# Altium PCB custom_line_V1.PcbDoc (part 2 of 2)
Units mm, origin at the board's own origin, x right, y up, seen from the top; angles counter-clockwise.
Board outline 111.2 x 38.5 mm, 2 copper layers (Top Layer, Bottom Layer); 243 components, 134 nets, 677 pads, 483 vias.
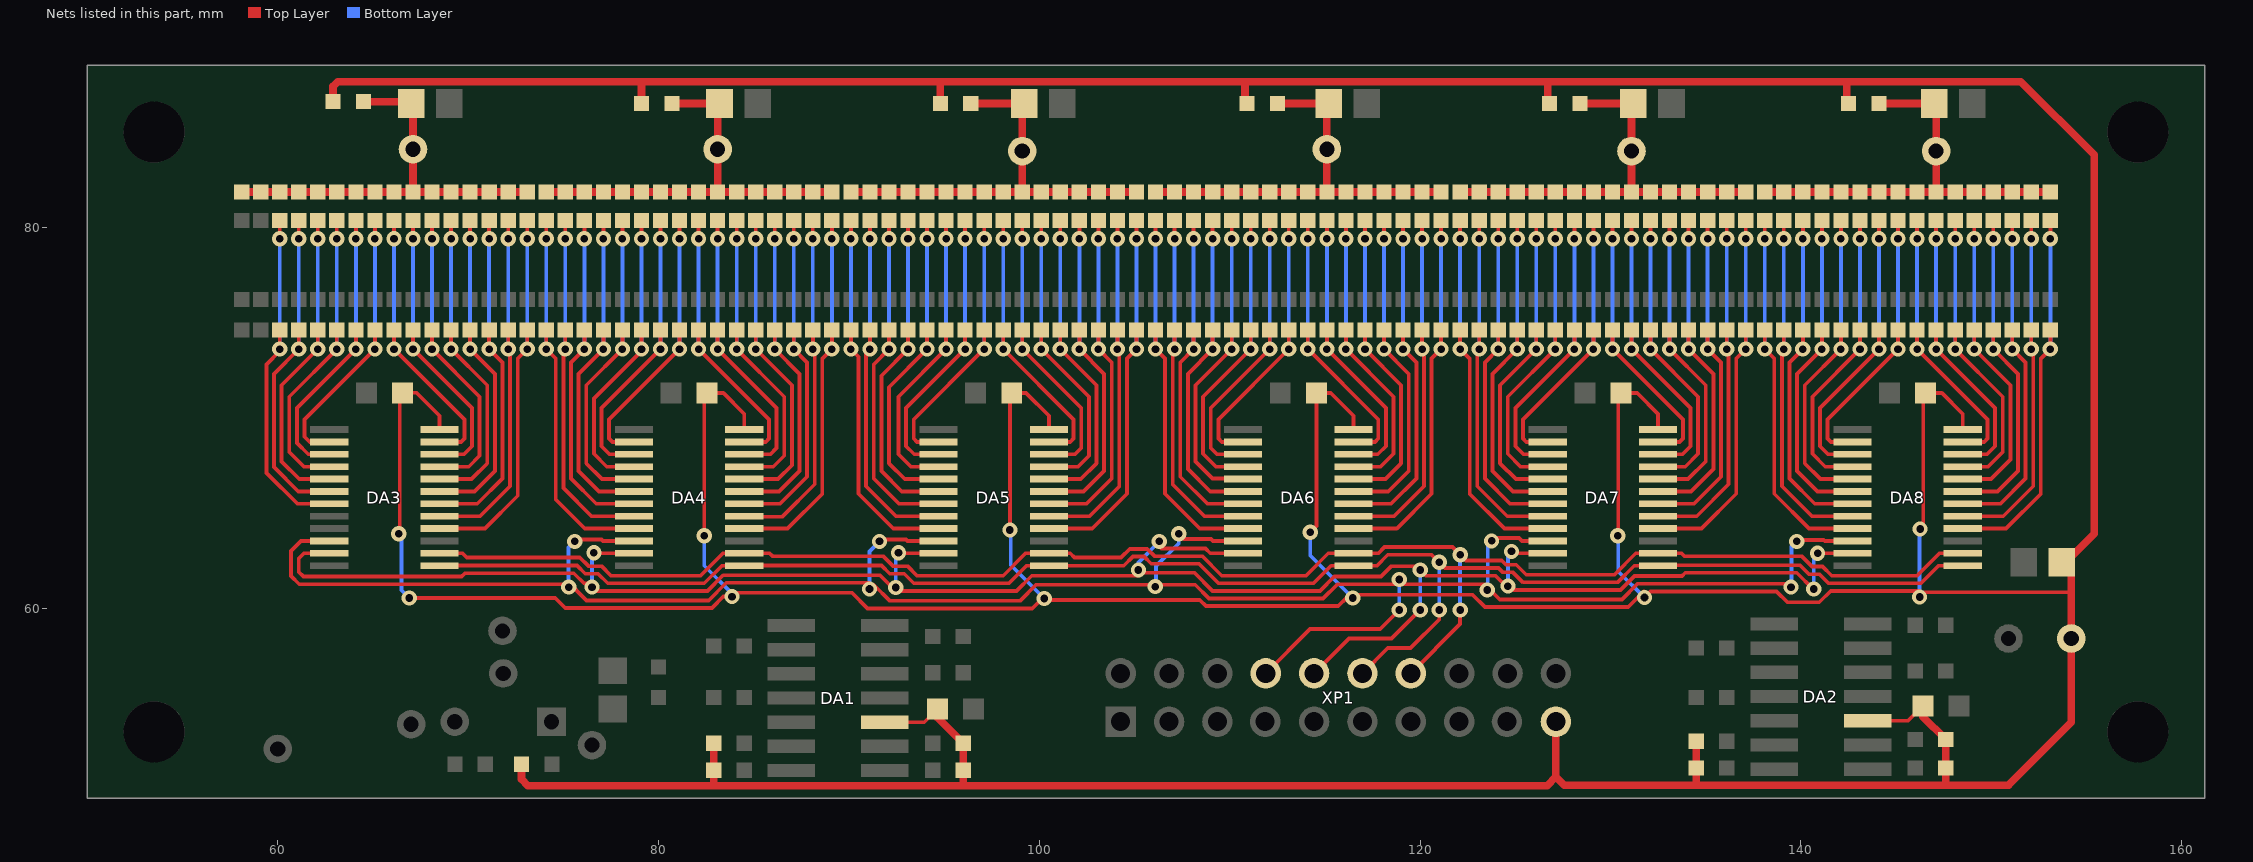
[diagram p2: the nets of this part, all layers, seen from the top]

## Via types
v1: diameter 0.8, hole 0.4, Top Layer to Bottom Layer, tented both sides, 387 vias
v2: diameter 0.8, hole 0.4, Top Layer to Bottom Layer, tented top, 96 vias

## Nets (pads, with @x,y where several pads share a name; then routed paths per layer and width w, separated by ;. In a path a pad name is that pad's centre, name@x,y a point inside that pad or via, vN(x,y) a via of type N, cw(c..) or ccw(c..) an arc to the next point about the centre after c; other vN are vias at no path point) (continued)
P3: DA3.7 R27.2 VT7.2 | length 18.4
  Top Layer w0.2: v2@60.1,73.5 59.4,72.8 59.4,67.1 61.025,65.475 DA3.7@62.7,65.475 ; v2@60.1,73.59 R27.2@60.1,74.6 ; v1(60.1,79.4) VT7.2@60.1,80.35
  Bottom Layer w0.2: v2@60.1,73.59 v1(60.1,79.4)
  other v2: 60.1,73.6
P4: DA3.6 R30.2 VT10.2 | length 17.9
  Top Layer w0.2: R30.2@61.1,74.6 v2(61.1,73.6) 59.8,72.3 59.8,67.4 61.075,66.125 DA3.6@62.7,66.125 ; v1(61.1,79.4) VT10.2@61.1,80.35
  Bottom Layer w0.2: v2(61.1,73.6) v1(61.1,79.4)
P5: DA3.5 R33.2 VT13.2 | length 17.3
  Top Layer w0.2: R33.2@62.1,74.6 v2(62.1,73.6) 60.2,71.7 60.2,67.7 61.125,66.775 DA3.5@62.7,66.775 ; v1(62.1,79.4) VT13.2@62.1,80.35
  Bottom Layer w0.2: v2(62.1,73.6) v1(62.1,79.4)
P6: DA3.4 R35.2 VT14.2 | length 16.6
  Top Layer w0.2: DA3.4@62.7,67.425 61.375,67.425 60.6,68.2 60.6,71.1 v2(63.1,73.6) R35.2@63.1,74.6 ; v1(63.1,79.4) VT14.2@63.1,80.35
  Bottom Layer w0.2: v2(63.1,73.6) v1(63.1,79.4)
P7: DA3.3 R36.2 VT15.2 | length 15.9
  Top Layer w0.2: DA3.3@62.7,68.075 61.601,68.075 61,68.676 61,70.5 v2(64.1,73.6) R36.2@64.1,74.6 ; v1(64.1,79.4) VT15.2@64.1,80.35
  Bottom Layer w0.2: v2(64.1,73.6) v1(64.1,79.4)
P8: DA3.2 R37.2 VT16.2 | length 15.3
  Top Layer w0.2: DA3.2@62.7,68.725 61.675,68.725 61.4,69 61.4,69.9 v2(65.1,73.6) R37.2@65.1,74.6 ; v1(65.1,79.4) VT16.2@65.1,80.35
  Bottom Layer w0.2: v2(65.1,73.6) v1(65.1,79.4)
P9: DA3.23 R22.2 VT1.2 | length 15.4
  Top Layer w0.2: R22.2@66.1,74.6 v2(66.1,73.6) 69.8,69.9 69.8,68.9 69.625,68.725 DA3.23@68.5,68.725 ; v1(66.1,79.4) VT1.2@66.1,80.35
  Bottom Layer w0.2: v2(66.1,73.6) v1(66.1,79.4)
P10: DA3.22 R25.2 VT5.2 | length 16
  Top Layer w0.2: R25.2@67.1,74.6 v2(67.1,73.6) 70.2,70.5 70.2,68.5 69.775,68.075 DA3.22@68.5,68.075 ; v1(67.1,79.4) VT5.2@67.1,80.35
  Bottom Layer w0.2: v2(67.1,73.6) v1(67.1,79.4)
P11: DA3.21 R28.2 VT8.2 | length 16.7
  Top Layer w0.2: R28.2@68.1,74.6 v2(68.1,73.6) 70.6,71.1 70.6,68 70.025,67.425 DA3.21@68.5,67.425 ; v1(68.1,79.4) VT8.2@68.1,80.35
  Bottom Layer w0.2: v2(68.1,73.6) v1(68.1,79.4)
P12: DA3.20 R31.2 VT11.2 | length 17.4
  Top Layer w0.2: DA3.20@68.5,66.775 70.175,66.775 71,67.6 71,71.7 v2(69.1,73.6) R31.2@69.1,74.6 ; v1(69.1,79.4) VT11.2@69.1,80.35
  Bottom Layer w0.2: v2(69.1,73.6) v1(69.1,79.4)
P13: DA3.19 R23.2 VT3.2 | length 18
  Top Layer w0.2: DA3.19@68.5,66.125 70.325,66.125 71.4,67.2 71.4,72.3 v2(70.1,73.6) R23.2@70.1,74.6 ; v1(70.1,79.4) VT3.2@70.1,80.35
  Bottom Layer w0.2: v2(70.1,73.6) v1(70.1,79.4)
P14: DA3.18 R26.2 VT6.2 | length 18.7
  Top Layer w0.2: DA3.18@68.5,65.475 70.475,65.475 71.8,66.8 71.8,72.9 v2(71.1,73.6) R26.2@71.1,74.6 ; v1(71.1,79.4) VT6.2@71.1,80.35
  Bottom Layer w0.2: v2(71.1,73.6) v1(71.1,79.4)
P15: DA3.17 R29.2 VT9.2 | length 19
  Top Layer w0.2: DA3.17@68.5,64.825 70.625,64.825 72.2,66.4 72.2,73.2 ; R29.2@72.1,74.6 v2(72.1,73.6) v2@72.2,73.5 ; v1(72.1,79.4) VT9.2@72.1,80.35
  Bottom Layer w0.2: v2(72.1,73.6) v1(72.1,79.4)
P16: DA3.16 R32.2 VT12.2 | length 20.5
  Top Layer w0.2: DA3.16@68.5,64.175 70.875,64.175 72.6,65.9 72.6,73.1 v2(73.1,73.6) R32.2@73.1,74.6 ; v1(73.1,79.4) VT12.2@73.1,80.35
  Bottom Layer w0.2: v2(73.1,73.6) v1(73.1,79.4)
P17: DA4.9 R38.2 VT18.2 | length 20.6
  Top Layer w0.2: R38.2@74.1,74.6 v2(74.1,73.6) 74.6,73.1 74.6,65.7 76.125,64.175 DA4.9@78.7,64.175 ; v1(74.1,79.4) VT18.2@74.1,80.35
  Bottom Layer w0.2: v2(74.1,73.6) v1(74.1,79.4)
P18: DA4.8 R41.2 VT20.2 | length 19.3
  Top Layer w0.2: v2@75,73.5 75,66.3 76.475,64.825 DA4.8@78.7,64.825 ; v2(75.1,73.6) R41.2@75.1,74.6 ; v1(75.1,79.4) VT20.2@75.1,80.35
  Bottom Layer w0.2: v2(75.1,73.6) v1(75.1,79.4)
P19: DA4.7 R44.2 VT23.2 | length 18.7
  Top Layer w0.2: R44.2@76.1,74.6 v2(76.1,73.6) 75.4,72.9 75.4,66.8 76.725,65.475 DA4.7@78.7,65.475 ; v1(76.1,79.4) VT23.2@76.1,80.35
  Bottom Layer w0.2: v2(76.1,73.6) v1(76.1,79.4)
P20: DA4.6 R47.2 VT26.2 | length 18
  Top Layer w0.2: R47.2@77.1,74.6 v2(77.1,73.6) 75.8,72.3 75.8,67.2 76.875,66.125 DA4.6@78.7,66.125 ; v1(77.1,79.4) VT26.2@77.1,80.35
  Bottom Layer w0.2: v2(77.1,73.6) v1(77.1,79.4)
P21: DA4.5 R50.2 VT29.2 | length 17.4
  Top Layer w0.2: R50.2@78.1,74.6 v2(78.1,73.6) 76.2,71.7 76.2,67.6 77.025,66.775 DA4.5@78.7,66.775 ; v1(78.1,79.4) VT29.2@78.1,80.35
  Bottom Layer w0.2: v2(78.1,73.6) v1(78.1,79.4)
P22: DA4.4 R52.2 VT30.2 | length 16.6
  Top Layer w0.2: DA4.4@78.7,67.425 77.275,67.425 76.6,68.1 76.6,71 v2@79.1,73.5 ; v2@79.1,73.59 R52.2@79.1,74.6 ; v1(79.1,79.4) VT30.2@79.1,80.35
  Bottom Layer w0.2: v2@79.1,73.59 v1(79.1,79.4)
  other v2: 79.1,73.6
P23: DA4.3 R53.2 VT31.2 | length 16
  Top Layer w0.2: DA4.3@78.7,68.075 77.425,68.075 77,68.5 77,70.5 v2(80.1,73.6) R53.2@80.1,74.6 ; v1(80.1,79.4) VT31.2@80.1,80.35
  Bottom Layer w0.2: v2(80.1,73.6) v1(80.1,79.4)
P24: DA4.2 R54.2 VT32.2 | length 15.4
  Top Layer w0.2: DA4.2@78.7,68.725 77.575,68.725 77.4,68.9 77.4,69.9 v2(81.1,73.6) R54.2@81.1,74.6 ; v1(81.1,79.4) VT32.2@81.1,80.35
  Bottom Layer w0.2: v2(81.1,73.6) v1(81.1,79.4)
P25: DA4.23 R39.2 VT17.2 | length 15.4
  Top Layer w0.2: R39.2@82.1,74.6 v2(82.1,73.6) 85.8,69.9 85.8,68.9 85.625,68.725 DA4.23@84.5,68.725 ; v1(82.1,79.4) VT17.2@82.1,80.35
  Bottom Layer w0.2: v2(82.1,73.6) v1(82.1,79.4)
P26: DA4.22 R42.2 VT21.2 | length 16.1
  Top Layer w0.2: R42.2@83.1,74.6 v2(83.1,73.6) 86.2,70.5 86.2,68.4 85.875,68.075 DA4.22@84.5,68.075 ; v1(83.1,79.4) VT21.2@83.1,80.35
  Bottom Layer w0.2: v2(83.1,73.6) v1(83.1,79.4)
P27: DA4.21 R45.2 VT24.2 | length 16.7
  Top Layer w0.2: R45.2@84.1,74.6 v2(84.1,73.6) 86.6,71.1 86.6,68 86.025,67.425 DA4.21@84.5,67.425 ; v1(84.1,79.4) VT24.2@84.1,80.35
  Bottom Layer w0.2: v2(84.1,73.6) v1(84.1,79.4)
P28: DA4.20 R48.2 VT27.2 | length 17.4
  Top Layer w0.2: DA4.20@84.5,66.775 86.275,66.775 87,67.5 87,71.7 v2(85.1,73.6) R48.2@85.1,74.6 ; v1(85.1,79.4) VT27.2@85.1,80.35
  Bottom Layer w0.2: v2(85.1,73.6) v1(85.1,79.4)
P29: DA4.19 R40.2 VT19.2 | length 18
  Top Layer w0.2: DA4.19@84.5,66.125 86.325,66.125 87.4,67.2 87.4,72.3 v2(86.1,73.6) R40.2@86.1,74.6 ; v1(86.1,79.4) VT19.2@86.1,80.35
  Bottom Layer w0.2: v2(86.1,73.6) v1(86.1,79.4)
P30: DA4.18 R43.2 VT22.2 | length 18.6
  Top Layer w0.2: DA4.18@84.5,65.475 86.375,65.475 87.8,66.9 87.8,72.9 v2(87.1,73.6) R43.2@87.1,74.6 ; v1(87.1,79.4) VT22.2@87.1,80.35
  Bottom Layer w0.2: v2(87.1,73.6) v1(87.1,79.4)
P31: DA4.17 R46.2 VT25.2 | length 19.3
  Top Layer w0.2: DA4.17@84.5,64.825 84.525,64.8 86.5,64.8 88.2,66.5 88.2,73.5 v2(88.1,73.6) 88.1,74.1 88.105,74.095 ; v1(88.1,79.4) VT25.2@88.1,80.35 ; v2@88.105,73.6 88.105,74.095 ; R46.2@88.105,74.595 88.105,74.095
  Bottom Layer w0.2: 88.1,74.1 v1(88.1,79.4)
P32: DA4.16 R49.2 VT28.2 | length 20.4
  Top Layer w0.2: DA4.16@84.5,64.175 86.775,64.175 88.6,66 88.6,73.1 v2(89.1,73.6) R49.2@89.1,74.6 ; v1(89.1,79.4) VT28.2@89.1,80.35
  Bottom Layer w0.2: v2(89.1,73.6) v1(89.1,79.4)
P33: DA5.9 R55.2 VT34.2 | length 20.5
  Top Layer w0.2: R55.2@90.1,74.6 v2(90.1,73.6) 90.5,73.2 90.5,66 92.325,64.175 DA5.9@94.7,64.175 ; v1(90.1,79.4) VT34.2@90.1,80.35
  Bottom Layer w0.2: v2(90.1,73.6) v1(90.1,79.4)
P34: DA5.8 R58.2 VT36.2 | length 19.5
  Top Layer w0.2: R58.2@91.1,74.6 v2(91.1,73.6) 90.9,73.4 90.9,66.4 92.475,64.825 DA5.8@94.7,64.825 ; v1(91.1,79.4) VT36.2@91.1,80.35
  Bottom Layer w0.2: v2(91.1,73.6) v1(91.1,79.4)
P35: DA5.7 R61.2 VT39.2 | length 18.8
  Top Layer w0.2: R61.2@92.1,74.6 v2(92.1,73.6) 91.3,72.8 91.3,66.8 92.625,65.475 DA5.7@94.7,65.475 ; v1(92.1,79.4) VT39.2@92.1,80.35
  Bottom Layer w0.2: v2(92.1,73.6) v1(92.1,79.4)
P36: DA5.6 R64.2 VT42.2 | length 18.2
  Top Layer w0.2: R64.2@93.1,74.6 v2(93.1,73.6) 91.7,72.2 91.7,67.2 92.775,66.125 DA5.6@94.7,66.125 ; v1(93.1,79.4) VT42.2@93.1,80.35
  Bottom Layer w0.2: v2(93.1,73.6) v1(93.1,79.4)
P37: DA5.5 R67.2 VT45.2 | length 17.5
  Top Layer w0.2: R67.2@94.1,74.6 v2(94.1,73.6) 92.1,71.6 92.1,67.6 92.925,66.775 DA5.5@94.7,66.775 ; v1(94.1,79.4) VT45.2@94.1,80.35
  Bottom Layer w0.2: v2(94.1,73.6) v1(94.1,79.4)
P38: DA5.4 R69.2 VT46.2 | length 16.7
  Top Layer w0.2: DA5.4@94.7,67.425 93.251,67.425 92.6,68.076 92.6,71.1 v2(95.1,73.6) R69.2@95.1,74.6 ; v1(95.1,79.4) VT46.2@95.1,80.35
  Bottom Layer w0.2: v2(95.1,73.6) v1(95.1,79.4)
P39: DA5.3 R70.2 VT47.2 | length 16
  Top Layer w0.2: DA5.3@94.7,68.075 93.425,68.075 93,68.5 93,70.5 v2(96.1,73.6) R70.2@96.1,74.6 ; v1(96.1,79.4) VT47.2@96.1,80.35
  Bottom Layer w0.2: v2(96.1,73.6) v1(96.1,79.4)
P40: DA5.2 R71.2 VT48.2 | length 15.4
  Top Layer w0.2: DA5.2@94.7,68.725 93.575,68.725 93.4,68.9 93.4,69.9 v2(97.1,73.6) R71.2@97.1,74.6 ; v1(97.1,79.4) VT48.2@97.1,80.35
  Bottom Layer w0.2: v2(97.1,73.6) v1(97.1,79.4)
P41: DA5.23 R56.2 VT33.2 | length 15.4
  Top Layer w0.2: R56.2@98.1,74.6 v2(98.1,73.6) 101.8,69.9 101.8,68.9 101.625,68.725 DA5.23@100.5,68.725 ; v1(98.1,79.4) VT33.2@98.1,80.35
  Bottom Layer w0.2: v2(98.1,73.6) v1(98.1,79.4)
P42: DA5.22 R59.2 VT37.2 | length 16.1
  Top Layer w0.2: R59.2@99.1,74.6 v2(99.1,73.6) 102.2,70.5 102.2,68.4 101.875,68.075 DA5.22@100.5,68.075 ; v1(99.1,79.4) VT37.2@99.1,80.35
  Bottom Layer w0.2: v2(99.1,73.6) v1(99.1,79.4)
P43: DA5.21 R62.2 VT40.2 | length 16.7
  Top Layer w0.2: R62.2@100.1,74.6 v2(100.1,73.6) 102.6,71.1 102.6,68 102.025,67.425 DA5.21@100.5,67.425 ; v1(100.1,79.4) VT40.2@100.1,80.35
  Bottom Layer w0.2: v2(100.1,73.6) v1(100.1,79.4)
P44: DA5.20 R65.2 VT43.2 | length 17.4
  Top Layer w0.2: DA5.20@100.5,66.775 102.175,66.775 103,67.6 103,71.7 v2(101.1,73.6) R65.2@101.1,74.6 ; v1(101.1,79.4) VT43.2@101.1,80.35
  Bottom Layer w0.2: v2(101.1,73.6) v1(101.1,79.4)
P45: DA5.19 R57.2 VT35.2 | length 18
  Top Layer w0.2: DA5.19@100.5,66.125 102.325,66.125 103.4,67.2 103.4,72.3 v2(102.1,73.6) R57.2@102.1,74.6 ; v1(102.1,79.4) VT35.2@102.1,80.35
  Bottom Layer w0.2: v2(102.1,73.6) v1(102.1,79.4)
P46: DA5.18 R60.2 VT38.2 | length 18.7
  Top Layer w0.2: DA5.18@100.5,65.475 102.475,65.475 103.8,66.8 103.8,72.9 v2(103.1,73.6) R60.2@103.1,74.6 ; v1(103.1,79.4) VT38.2@103.1,80.35
  Bottom Layer w0.2: v2(103.1,73.6) v1(103.1,79.4)
P47: DA5.17 R63.2 VT41.2 | length 19.2
  Top Layer w0.2: DA5.17@100.5,64.825 102.625,64.825 104.2,66.4 v2@104.2,73.5 ; v2(104.1,73.6) R63.2@104.1,74.6 ; v1(104.1,79.4) VT41.2@104.1,80.35
  Bottom Layer w0.2: v2(104.1,73.6) v1(104.1,79.4)
P48: DA5.16 R66.2 VT44.2 | length 20.4
  Top Layer w0.2: DA5.16@100.5,64.175 102.775,64.175 104.6,66 104.6,73.1 v2(105.1,73.6) R66.2@105.1,74.6 ; v1(105.1,79.4) VT44.2@105.1,80.35
  Bottom Layer w0.2: v2(105.1,73.6) v1(105.1,79.4)
P49: DA6.9 R72.2 VT50.2 | length 20.4
  Top Layer w0.2: R72.2@106.1,74.6 v2(106.1,73.6) 106.6,73.1 106.6,66 108.425,64.175 DA6.9@110.7,64.175 ; v1(106.1,79.4) VT50.2@106.1,80.35
  Bottom Layer w0.2: v2(106.1,73.6) v1(106.1,79.4)
P50: DA6.8 R75.2 VT52.2 | length 19.1
  Top Layer w0.2: v2@107,73.5 107,66.5 108.675,64.825 DA6.8@110.7,64.825 ; v2(107.1,73.6) R75.2@107.1,74.6 ; v1(107.1,79.4) VT52.2@107.1,80.35
  Bottom Layer w0.2: v2(107.1,73.6) v1(107.1,79.4)
P51: DA6.7 R78.2 VT55.2 | length 18.6
  Top Layer w0.2: R78.2@108.1,74.6 v2(108.1,73.6) 107.4,72.9 107.4,66.9 108.825,65.475 DA6.7@110.7,65.475 ; v1(108.1,79.4) VT55.2@108.1,80.35
  Bottom Layer w0.2: v2(108.1,73.6) v1(108.1,79.4)
P52: DA6.6 R81.2 VT58.2 | length 18
  Top Layer w0.2: R81.2@109.1,74.6 v2(109.1,73.6) 107.8,72.3 107.8,67.3 108.975,66.125 DA6.6@110.7,66.125 ; v1(109.1,79.4) VT58.2@109.1,80.35
  Bottom Layer w0.2: v2(109.1,73.6) v1(109.1,79.4)
P53: DA6.5 R84.2 VT61.2 | length 17.3
  Top Layer w0.2: R84.2@110.1,74.6 v2(110.1,73.6) 108.2,71.7 108.2,67.7 109.1,66.8 110.675,66.8 DA6.5@110.7,66.775 ; v1(110.1,79.4) VT61.2@110.1,80.35
  Bottom Layer w0.2: v2(110.1,73.6) v1(110.1,79.4)
P54: DA6.4 R86.2 VT62.2 | length 16.7
  Top Layer w0.2: DA6.4@110.7,67.425 109.275,67.425 108.6,68.1 108.6,71.1 v2(111.1,73.6) R86.2@111.1,74.6 ; v1(111.1,79.4) VT62.2@111.1,80.35
  Bottom Layer w0.2: v2(111.1,73.6) v1(111.1,79.4)
P55: DA6.3 R87.2 VT63.2 | length 16.1
  Top Layer w0.2: DA6.3@110.7,68.075 109.325,68.075 109,68.4 109,70.5 v2(112.1,73.6) R87.2@112.1,74.6 ; v1(112.1,79.4) VT63.2@112.1,80.35
  Bottom Layer w0.2: v2(112.1,73.6) v1(112.1,79.4)
P56: DA6.2 R88.2 VT64.2 | length 15.4
  Top Layer w0.2: DA6.2@110.7,68.725 109.575,68.725 109.4,68.9 109.4,69.9 v2(113.1,73.6) R88.2@113.1,74.6 ; v1(113.1,79.4) VT64.2@113.1,80.35
  Bottom Layer w0.2: v2(113.1,73.6) v1(113.1,79.4)
P57: DA6.23 R73.2 VT49.2 | length 15.4
  Top Layer w0.2: R73.2@114.1,74.6 v2(114.1,73.6) 117.8,69.9 117.8,68.9 117.625,68.725 DA6.23@116.5,68.725 ; v1(114.1,79.4) VT49.2@114.1,80.35
  Bottom Layer w0.2: v2(114.1,73.6) v1(114.1,79.4)
P58: DA6.22 R76.2 VT53.2 | length 16
  Top Layer w0.2: R76.2@115.1,74.6 v2(115.1,73.6) 118.2,70.5 118.2,68.5 117.775,68.075 DA6.22@116.5,68.075 ; v1(115.1,79.4) VT53.2@115.1,80.35
  Bottom Layer w0.2: v2(115.1,73.6) v1(115.1,79.4)
P59: DA6.21 R79.2 VT56.2 | length 16.7
  Top Layer w0.2: R79.2@116.1,74.6 v2(116.1,73.6) 118.6,71.1 118.6,68.1 117.925,67.425 DA6.21@116.5,67.425 ; v1(116.1,79.4) VT56.2@116.1,80.35
  Bottom Layer w0.2: v2(116.1,73.6) v1(116.1,79.4)
P60: DA6.20 R82.2 VT59.2 | length 17.4
  Top Layer w0.2: DA6.20@116.5,66.775 118.175,66.775 119,67.6 119,71.7 v2(117.1,73.6) R82.2@117.1,74.6 ; v1(117.1,79.4) VT59.2@117.1,80.35
  Bottom Layer w0.2: v2(117.1,73.6) v1(117.1,79.4)
P61: DA6.19 R74.2 VT51.2 | length 18
  Top Layer w0.2: DA6.19@116.5,66.125 118.325,66.125 119.4,67.2 119.4,72.3 v2(118.1,73.6) R74.2@118.1,74.6 ; v1(118.1,79.4) VT51.2@118.1,80.35
  Bottom Layer w0.2: v2(118.1,73.6) v1(118.1,79.4)
P62: DA6.18 R77.2 VT54.2 | length 18.7
  Top Layer w0.2: DA6.18@116.5,65.475 118.475,65.475 119.8,66.8 119.8,72.9 v2(119.1,73.6) R77.2@119.1,74.6 ; v1(119.1,79.4) VT54.2@119.1,80.35
  Bottom Layer w0.2: v2(119.1,73.6) v1(119.1,79.4)
P63: DA6.17 R80.2 VT57.2 | length 18.9
  Top Layer w0.2: DA6.17@116.5,64.825 118.625,64.825 120.2,66.4 120.2,73.2 ; v2(120.1,73.6) R80.2@120.1,74.6 ; v1(120.1,79.4) VT57.2@120.1,80.35
  Bottom Layer w0.2: v2(120.1,73.6) v1(120.1,79.4)
P64: DA6.16 R83.2 VT60.2 | length 20.4
  Top Layer w0.2: DA6.16@116.5,64.175 118.775,64.175 120.6,66 120.6,73.1 v2(121.1,73.6) R83.2@121.1,74.6 ; v1(121.1,79.4) VT60.2@121.1,80.35
  Bottom Layer w0.2: v2(121.1,73.6) v1(121.1,79.4)
P65: DA7.9 R89.2 VT66.2 | length 20.4
  Top Layer w0.2: R89.2@122.1,74.6 v2(122.1,73.6) 122.6,73.1 122.6,66 124.425,64.175 DA7.9@126.7,64.175 ; v1(122.1,79.4) VT66.2@122.1,80.35
  Bottom Layer w0.2: v2(122.1,73.6) v1(122.1,79.4)
P66: DA7.8 R92.2 VT68.2 | length 19.2
  Top Layer w0.2: v2@123,73.5 123,66.4 124.575,64.825 DA7.8@126.7,64.825 ; v2(123.1,73.6) R92.2@123.1,74.6 ; v1(123.1,79.4) VT68.2@123.1,80.35
  Bottom Layer w0.2: v2(123.1,73.6) v1(123.1,79.4)
P67: DA7.7 R95.2 VT71.2 | length 18.7
  Top Layer w0.2: R95.2@124.1,74.6 v2(124.1,73.6) 123.4,72.9 123.4,66.8 124.725,65.475 DA7.7@126.7,65.475 ; v1(124.1,79.4) VT71.2@124.1,80.35
  Bottom Layer w0.2: v2(124.1,73.6) v1(124.1,79.4)
P68: DA7.6 R98.2 VT74.2 | length 18
  Top Layer w0.2: R98.2@125.1,74.6 v2(125.1,73.6) 123.8,72.3 123.8,67.2 124.875,66.125 DA7.6@126.7,66.125 ; v1(125.1,79.4) VT74.2@125.1,80.35
  Bottom Layer w0.2: v2(125.1,73.6) v1(125.1,79.4)
P69: DA7.5 R101.2 VT77.2 | length 17.4
  Top Layer w0.2: R101.2@126.1,74.6 v2(126.1,73.6) 124.2,71.7 124.2,67.6 125.025,66.775 DA7.5@126.7,66.775 ; v1(126.1,79.4) VT77.2@126.1,80.35
  Bottom Layer w0.2: v2(126.1,73.6) v1(126.1,79.4)
P70: DA7.4 R103.2 VT78.2 | length 16.7
  Top Layer w0.2: DA7.4@126.7,67.425 125.275,67.425 124.6,68.1 124.6,71.1 v2(127.1,73.6) R103.2@127.1,74.6 ; v1(127.1,79.4) VT78.2@127.1,80.35
  Bottom Layer w0.2: v2(127.1,73.6) v1(127.1,79.4)
P71: DA7.3 R104.2 VT79.2 | length 16
  Top Layer w0.2: DA7.3@126.7,68.075 125.425,68.075 125,68.5 125,70.5 v2(128.1,73.6) R104.2@128.1,74.6 ; v1(128.1,79.4) VT79.2@128.1,80.35
  Bottom Layer w0.2: v2(128.1,73.6) v1(128.1,79.4)
P72: DA7.2 R105.2 VT80.2 | length 15.4
  Top Layer w0.2: DA7.2@126.7,68.725 125.575,68.725 125.4,68.9 125.4,69.9 v2(129.1,73.6) R105.2@129.1,74.6 ; v1(129.1,79.4) VT80.2@129.1,80.35
  Bottom Layer w0.2: v2(129.1,73.6) v1(129.1,79.4)
P73: DA7.23 R90.2 VT65.2 | length 15.4
  Top Layer w0.2: R90.2@130.1,74.6 v2(130.1,73.6) 133.8,69.9 133.8,68.9 133.625,68.725 DA7.23@132.5,68.725 ; v1(130.1,79.4) VT65.2@130.1,80.35
  Bottom Layer w0.2: v2(130.1,73.6) v1(130.1,79.4)
P74: DA7.22 R93.2 VT69.2 | length 16
  Top Layer w0.2: R93.2@131.1,74.6 v2(131.1,73.6) 134.2,70.5 134.2,68.5 133.775,68.075 DA7.22@132.5,68.075 ; v1(131.1,79.4) VT69.2@131.1,80.35
  Bottom Layer w0.2: v2(131.1,73.6) v1(131.1,79.4)
P75: DA7.21 R96.2 VT72.2 | length 16.7
  Top Layer w0.2: R96.2@132.1,74.6 v2(132.1,73.6) 134.6,71.1 134.6,68.1 133.925,67.425 DA7.21@132.5,67.425 ; v1(132.1,79.4) VT72.2@132.1,80.35
  Bottom Layer w0.2: v2(132.1,73.6) v1(132.1,79.4)
P76: DA7.20 R99.2 VT75.2 | length 17.3
  Top Layer w0.2: DA7.20@132.5,66.775 134.075,66.775 135,67.7 135,71.7 v2(133.1,73.6) R99.2@133.1,74.6 ; v1(133.1,79.4) VT75.2@133.1,80.35
  Bottom Layer w0.2: v2(133.1,73.6) v1(133.1,79.4)
P77: DA7.19 R91.2 VT67.2 | length 18
  Top Layer w0.2: DA7.19@132.5,66.125 134.225,66.125 135.4,67.3 135.4,72.3 v2(134.1,73.6) R91.2@134.1,74.6 ; v1(134.1,79.4) VT67.2@134.1,80.35
  Bottom Layer w0.2: v2(134.1,73.6) v1(134.1,79.4)
P78: DA7.18 R94.2 VT70.2 | length 18.6
  Top Layer w0.2: DA7.18@132.5,65.475 134.375,65.475 135.8,66.9 135.8,72.9 v2(135.1,73.6) R94.2@135.1,74.6 ; v1(135.1,79.4) VT70.2@135.1,80.35
  Bottom Layer w0.2: v2(135.1,73.6) v1(135.1,79.4)
P79: DA7.17 R97.2 VT73.2 | length 19.1
  Top Layer w0.2: DA7.17@132.5,64.825 134.525,64.825 136.2,66.5 v2@136.2,73.5 ; v2(136.1,73.6) R97.2@136.1,74.6 ; v1(136.1,79.4) VT73.2@136.1,80.35
  Bottom Layer w0.2: v2(136.1,73.6) v1(136.1,79.4)
P80: DA7.16 R100.2 VT76.2 | length 20.4
  Top Layer w0.2: DA7.16@132.5,64.175 134.775,64.175 136.6,66 136.6,73.1 v2(137.1,73.6) R100.2@137.1,74.6 ; v1(137.1,79.4) VT76.2@137.1,80.35
  Bottom Layer w0.2: v2(137.1,73.6) v1(137.1,79.4)
P81: DA8.9 R106.2 VT82.2 | length 20.4
  Top Layer w0.2: R106.2@138.1,74.6 v2(138.1,73.6) 138.6,73.1 138.6,66 140.425,64.175 DA8.9@142.7,64.175 ; v1(138.1,79.4) VT82.2@138.1,80.35
  Bottom Layer w0.2: v2(138.1,73.6) v1(138.1,79.4)
P82: DA8.8 R109.2 VT84.2 | length 19.2
  Top Layer w0.2: v2@139,73.5 139,66.4 140.575,64.825 DA8.8@142.7,64.825 ; v2(139.1,73.6) R109.2@139.1,74.6 ; v1(139.1,79.4) VT84.2@139.1,80.35
  Bottom Layer w0.2: v2(139.1,73.6) v1(139.1,79.4)
P83: DA8.7 R112.2 VT87.2 | length 18.7
  Top Layer w0.2: R112.2@140.1,74.6 v2(140.1,73.6) 139.4,72.9 139.4,66.8 140.725,65.475 DA8.7@142.7,65.475 ; v1(140.1,79.4) VT87.2@140.1,80.35
  Bottom Layer w0.2: v2(140.1,73.6) v1(140.1,79.4)
P84: DA8.6 R115.2 VT90.2 | length 18
  Top Layer w0.2: R115.2@141.1,74.6 v2(141.1,73.6) 139.8,72.3 139.8,67.2 140.875,66.125 DA8.6@142.7,66.125 ; v1(141.1,79.4) VT90.2@141.1,80.35
  Bottom Layer w0.2: v2(141.1,73.6) v1(141.1,79.4)
P85: DA8.5 R118.2 VT93.2 | length 17.4
  Top Layer w0.2: R118.2@142.1,74.6 v2(142.1,73.6) 140.2,71.7 140.2,67.6 141.025,66.775 DA8.5@142.7,66.775 ; v1(142.1,79.4) VT93.2@142.1,80.35
  Bottom Layer w0.2: v2(142.1,73.6) v1(142.1,79.4)
P86: DA8.4 R120.2 VT94.2 | length 16.7
  Top Layer w0.2: DA8.4@142.7,67.425 141.275,67.425 140.6,68.1 140.6,71.1 v2(143.1,73.6) R120.2@143.1,74.6 ; v1(143.1,79.4) VT94.2@143.1,80.35
  Bottom Layer w0.2: v2(143.1,73.6) v1(143.1,79.4)
P87: DA8.3 R121.2 VT95.2 | length 16
  Top Layer w0.2: DA8.3@142.7,68.075 141.425,68.075 141,68.5 141,70.5 v2(144.1,73.6) R121.2@144.1,74.6 ; v1(144.1,79.4) VT95.2@144.1,80.35
  Bottom Layer w0.2: v2(144.1,73.6) v1(144.1,79.4)
P88: DA8.2 R122.2 VT96.2 | length 15.4
  Top Layer w0.2: DA8.2@142.7,68.725 141.575,68.725 141.4,68.9 141.4,69.9 v2(145.1,73.6) R122.2@145.1,74.6 ; v1(145.1,79.4) VT96.2@145.1,80.35
  Bottom Layer w0.2: v2(145.1,73.6) v1(145.1,79.4)
P89: DA8.23 R107.2 VT81.2 | length 15.4
  Top Layer w0.2: R107.2@146.1,74.6 v2(146.1,73.6) 149.8,69.9 149.8,68.9 149.625,68.725 DA8.23@148.5,68.725 ; v1(146.1,79.4) VT81.2@146.1,80.35
  Bottom Layer w0.2: v2(146.1,73.6) v1(146.1,79.4)
P90: DA8.22 R110.2 VT85.2 | length 16
  Top Layer w0.2: R110.2@147.1,74.6 v2(147.1,73.6) 150.2,70.5 150.2,68.5 149.775,68.075 DA8.22@148.5,68.075 ; v1(147.1,79.4) VT85.2@147.1,80.35
  Bottom Layer w0.2: v2(147.1,73.6) v1(147.1,79.4)
P91: DA8.21 R113.2 VT88.2 | length 16.6
  Top Layer w0.2: R113.2@148.1,74.6 v2(148.1,73.6) 150.6,71.1 150.6,68.2 149.825,67.425 DA8.21@148.5,67.425 ; v1(148.1,79.4) VT88.2@148.1,80.35
  Bottom Layer w0.2: v2(148.1,73.6) v1(148.1,79.4)
P92: DA8.20 R116.2 VT91.2 | length 17.3
  Top Layer w0.2: DA8.20@148.5,66.775 149.975,66.775 151,67.8 151,71.7 v2(149.1,73.6) R116.2@149.1,74.6 ; v1(149.1,79.4) VT91.2@149.1,80.35
  Bottom Layer w0.2: v2(149.1,73.6) v1(149.1,79.4)
P93: DA8.19 R108.2 VT83.2 | length 18
  Top Layer w0.2: DA8.19@148.5,66.125 150.325,66.125 151.4,67.2 151.4,72.3 v2(150.1,73.6) R108.2@150.1,74.6 ; v1(150.1,79.4) VT83.2@150.1,80.35
  Bottom Layer w0.2: v2(150.1,73.6) v1(150.1,79.4)
P94: DA8.18 R111.2 VT86.2 | length 18.7
  Top Layer w0.2: DA8.18@148.5,65.475 150.475,65.475 151.8,66.8 151.8,72.9 v2(151.1,73.6) R111.2@151.1,74.6 ; v1(151.1,79.4) VT86.2@151.1,80.35
  Bottom Layer w0.2: v2(151.1,73.6) v1(151.1,79.4)
P95: DA8.17 R114.2 VT89.2 | length 19.2
  Top Layer w0.2: DA8.17@148.5,64.825 150.625,64.825 152.2,66.4 v2@152.2,73.5 ; v2(152.1,73.6) R114.2@152.1,74.6 ; v1(152.1,79.4) VT89.2@152.1,80.35
  Bottom Layer w0.2: v2(152.1,73.6) v1(152.1,79.4)
P96: DA8.16 R117.2 VT92.2 | length 20.4
  Top Layer w0.2: DA8.16@148.5,64.175 150.775,64.175 152.6,66 152.6,73.1 v2(153.1,73.6) R117.2@153.1,74.6 ; v1(153.1,79.4) VT92.2@153.1,80.35
  Bottom Layer w0.2: v2(153.1,73.6) v1(153.1,79.4)
S0: DA3.10 DA4.10 DA5.10 DA6.10 DA7.10 DA8.10 XP1.8 | length 124.8
  Top Layer w0.2: DA3.10@62.7,63.525 61.225,63.525 60.7,63 60.7,61.675 61.125,61.25 75.125,61.25 v1(75.275,61.1) 75.525,61.1 75.8,60.825 75.8,60.81 76.21,60.4 82.631,60.4 83.556,61.325 v1@91.025,61.325 ; v1(75.6,63.5) 75.7,63.6 77,63.6 77.075,63.525 DA4.10@78.7,63.525 ; v1@91.025,61.2 91.079,61.146 v1(91.079,61.003) ; v1@91.301,61.224 92.147,60.378 98.978,60.378 99.825,61.225 108.191,61.225 108.916,60.5 114.9,60.5 115.65,61.25 123.384,61.25 124.181,60.453 130.6,60.453 131.422,61.275 139.3,61.275 v1(139.475,61.1) ; v1(91.6,63.5) 91.7,63.6 93,63.6 93.075,63.525 DA5.10@94.7,63.525 ; v1(106.08,61.128) v1@106.08,61.27 ; v1(107.325,63.9) 107.6,63.625 109.015,63.625 109.115,63.525 DA6.10@110.7,63.525 ; XP1.8@111.89,56.57 114.22,58.9 117.9,58.9 v1(118.9,59.9) ; v1(118.9,61.5) v1@118.9,61.6 ; v1(123.75,63.525) 123.9,63.675 125.2,63.675 125.35,63.525 DA7.10@126.7,63.525 ; v1(139.775,63.5) 139.85,63.575 141.2,63.575 141.25,63.525 DA8.10@142.7,63.525
  Bottom Layer w0.2: v1(75.275,61.1) 75.275,63.175 v1(75.6,63.5) ; v1(91.079,61.003) 91.075,61.007 91.075,62.975 v1(91.6,63.5) ; v1(106.08,61.128) 106.125,61.173 106.125,62.2 107.325,63.4 v1(107.325,63.9) ; v1(118.9,59.9) v1(118.9,61.5) ; v1@123.55,61.303 123.55,63.325 v1(123.75,63.525) ; v1@139.5,61.1 139.5,63.225 v1(139.775,63.5)
  other v1: 123.525,60.95
S1: DA3.11 DA4.11 DA5.11 DA6.11 DA7.11 DA8.11 XP1.10 | length 115.1
  Top Layer w0.2: DA3.11@62.7,62.875 61.375,62.875 61.1,62.6 61.1,61.9 61.35,61.65 69.647,61.65 69.825,61.828 75.547,61.828 76.075,61.3 v1@76.3,61.3 ; v1(76.5,61.1) 76.7,60.9 82.566,60.9 83.391,61.725 91.624,61.725 v1@92.124,61.225 ; v1@76.6,62.875 DA4.11@78.7,62.875 ; v1@92.6,60.9 98.8,60.9 99.6,61.7 v1@105.2,61.7 ; v1@92.6,62.875 DA5.11@94.7,62.875 ; v1(105.2,62) 105.35,61.85 108.15,61.85 109.1,60.9 114.734,60.9 115.484,61.65 117.95,61.65 118.5,62.2 119.8,62.2 v1(120,62) 120.3,61.7 123.954,61.7 124.501,61.153 v1(124.609,61.153) ; v1@106.4,63.125 108.721,63.125 108.971,62.875 DA6.11@110.7,62.875 ; XP1.10@114.43,56.57 116.26,58.4 118.5,58.4 v1(120,59.9) ; v1(124.8,62.975) 124.9,62.875 DA7.11@126.7,62.875 ; v1@124.911,60.95 130.531,60.95 131.256,61.675 133.75,61.675 133.925,61.85 139.779,61.85 140.629,61 v1(140.675,61) ; v1(140.875,62.875) DA8.11@142.7,62.875
  Bottom Layer w0.2: v1(76.5,61.1) 76.5,62.8 v1(76.6,62.9) ; v1(92.455,61.078) 92.455,62.755 v1(92.6,62.9) ; 105.2,62.4 v1(106.3,63.5) ; v1(120,59.9) v1(120,62) ; v1(124.609,61.153) 124.609,62.784 v1(124.8,62.975) ; v1(140.675,61) 140.675,62.675 v1(140.875,62.875)
S2: DA3.14 DA4.14 DA5.14 DA6.14 DA7.14 DA8.14 XP1.14 | length 92.8
  Top Layer w0.2: DA3.14@68.5,62.875 69.7,62.875 69.925,62.65 75.86,62.65 76.31,62.2 77,62.2 77.5,61.7 82.2,61.7 83.375,62.875 DA4.14@84.5,62.875 85.825,62.875 85.975,62.725 91.785,62.725 92.31,62.2 93.066,62.2 93.566,61.7 98.1,61.7 99.275,62.875 DA5.14@100.5,62.875 101.625,62.875 101.85,62.65 104.294,62.65 104.744,63.1 105.666,63.1 106.041,62.725 108.556,62.725 109.581,61.7 114,61.7 115.175,62.875 DA6.14@116.5,62.875 117.809,62.875 118.134,63.2 121.7,63.2 v1(122.1,62.8) 122.4,62.5 124.285,62.5 124.51,62.275 125.051,62.275 125.576,61.75 130.2,61.75 131.325,62.875 DA7.14@132.5,62.875 133.725,62.875 133.875,62.725 140.035,62.725 140.585,62.175 141.141,62.175 141.616,61.7 146.1,61.7 147.275,62.875 DA8.14@148.5,62.875 ; XP1.14@119.51,56.57 122.1,59.16 v1(122.1,59.9)
  Bottom Layer w0.2: v1(122.1,59.9) v1(122.1,62.8)
S3: DA3.13 DA4.13 DA5.13 DA6.13 DA7.13 DA8.13 XP1.12 | length 92.9
  Top Layer w0.2: DA3.13@68.5,62.225 68.503,62.228 75.716,62.228 76.144,61.8 76.825,61.8 77.325,61.3 82.4,61.3 83.325,62.225 DA4.13@84.5,62.225 84.503,62.228 91.716,62.228 92.144,61.8 92.9,61.8 93.4,61.3 98.4,61.3 99.325,62.225 DA5.13@100.5,62.225 104.435,62.225 104.91,62.7 105.5,62.7 105.875,62.325 108.39,62.325 109.415,61.3 114.4,61.3 115.325,62.225 DA6.13@116.5,62.225 117.725,62.225 118.3,62.8 120.6,62.8 v1(121,62.4) 121.3,62.1 124.119,62.1 124.344,61.875 124.885,61.875 125.41,61.35 130.366,61.35 131.241,62.225 131.325,62.225 DA7.13@132.5,62.225 132.525,62.25 139.944,62.25 140.419,61.775 140.975,61.775 141.45,61.3 146.3,61.3 147.225,62.225 DA8.13@148.5,62.225 ; XP1.12@116.97,56.57 118.3,57.9 119.5,57.9 121,59.4 v1(121,59.9)
  Bottom Layer w0.2: v1(121,59.9) v1(121,62.4)
VCC: C2.2 C3.2 C4.2 C6.2 C8.2 C10.2 C12.2 C14.2 C16.2 DA1.3 DA2.3 DA3.24 DA4.24 DA5.24 DA6.24 DA7.24 DA8.24 pad.13 R2.1 R7.1 R8.1 R9.1 R10.1 R11.1 R12.1 R13.1 R20.1 R34.1 R51.1 R68.1 R85.1 R102.1 R119.1 XP1.19 | length 416.2
  Top Layer w0.2: v1@66.4,63.9 66.4,71.35 67.3,71.3 68.5,70.1 DA3.24@68.5,69.375 ; v1(66.903,60.528) 74.572,60.528 75.1,60 82.797,60 83.397,60.6 83.857,60.6 v1(83.854,60.603) 84.051,60.8 90.15,60.8 90.972,59.978 99.628,59.978 100.175,60.525 100.233,60.525 v1(100.255,60.503) 100.33,60.428 108.422,60.428 108.75,60.1 115.7,60.1 116.128,60.528 v1(116.456,60.528) 116.628,60.7 122.75,60.7 123.397,60.053 130.928,60.053 131.75,60.875 131.781,60.844 v1(131.781,60.553) 132.103,60.875 138.71,60.875 139.285,60.3 140.965,60.3 141.565,60.9 146.2,60.9 146.232,60.868 v1(146.232,60.578) 146.479,60.825 154.2,60.825 ; v1(82.4,63.8) 82.4,71.15 C8.2@82.55,71.3 83.4,71.3 84.5,70.2 DA4.24@84.5,69.375 ; DA1.3@91.875,54.005 93.955,54.005 C2.2@94.65,54.7 ; v1(98.45,64.1) 98.45,71.3 C10.2@98.55,71.3 99.3,71.3 100.5,70.1 DA5.24@100.5,69.375 ; v1(114.225,63.975) 114.55,64.3 C12.2@114.55,71.3 115.3,71.3 116.5,70.1 DA6.24@116.5,69.375 ; v1(130.375,63.8) 130.375,63.625 130.4,63.6 130.4,71.15 C14.2@130.55,71.3 131.4,71.3 132.5,70.2 DA7.24@132.5,69.375 ; DA2.3@143.5,54.08 145.63,54.08 C3.2@146.4,54.85 ; v1(146.257,64.15) 146.425,64.318 146.425,71.175 C16.2@146.55,71.3 147.4,71.3 148.5,70.2 DA8.24@148.5,69.375
  Top Layer w0.4: R34.1@62.9,86.6 62.9,87.4 63.15,87.65 79.1,87.65 ; R2.1@72.8,51.8 72.8,51 73.125,50.675 96,50.675 ; R51.1@79.1,86.5 79.1,87.65 ; 82.9,50.7 R11.1@82.9,51.475 R13.1@82.9,52.9 ; C2.2@94.65,54.7 94.65,54.25 R9.1@96,52.9 R7.1@96,51.475 96,50.675 ; R68.1@94.8,86.5 94.8,87.65 ; R85.1@110.8,86.6 110.8,87.65 ; R102.1@126.7,86.6 126.7,87.65 ; XP1.19@127.13,54.03 127.13,51.13 ; R20.1@134.5,53 R12.1@134.5,51.6 134.5,50.7 ; R119.1@142.4,86.6 142.4,87.65 ; C3.2@146.4,54.85 146.4,54.3 R10.1@147.6,53.1 R8.1@147.6,51.6 147.6,50.7 ; 79.1,87.65 110.8,87.65 ; 96,50.675 126.675,50.675 127.13,51.13 ; 110.8,87.65 126.7,87.65 ; 126.7,87.65 142.4,87.65 ; 127.13,51.13 127.56,50.7 134.5,50.7 ; 134.5,50.7 147.6,50.7 ; 142.4,87.65 151.55,87.65 155.4,83.8 155.4,63.9 154.2,62.7 154.2,60.825 154.2,54 150.9,50.7 147.6,50.7
  Bottom Layer w0.2: v1(66.35,63.9) 66.5,63.75 66.5,60.931 v1(66.903,60.528) ; v1(82.4,63.8) 82.4,62.225 83.854,60.771 v1(83.854,60.603) ; v1(98.45,64.1) 98.5,64.05 98.5,62.258 v1(100.255,60.503) ; v1@114.225,63.775 114.225,62.759 v1(116.456,60.528) ; v1(130.375,63.8) 130.4,63.775 130.4,61.934 v1(131.781,60.553) ; v1(146.232,60.578) v1@146.232,64.125
VDD1: C5.2 pad.3 R34.2 VT1.1 VT2.1 VT3.1 VT4.1 VT5.1 VT6.1 VT7.1 VT8.1 VT9.1 VT10.1 VT11.1 VT12.1 VT13.1 VT14.1 VT15.1 VT16.1 | length 21.9
  Top Layer w0.4: VT2.1@58.1,81.85 VT4.1@59.1,81.85 VT7.1@60.1,81.85 VT10.1@61.1,81.85 VT13.1@62.1,81.85 VT14.1@63.1,81.85 VT15.1@64.1,81.85 VT16.1@65.1,81.85 VT1.1@66.1,81.85 VT5.1@67.1,81.85 ; R34.2@64.5,86.6 C5.2@66.9,86.6 ; C5.2@67.1,86.4 VT5.1@67.1,81.85 ; VT12.1@73.1,81.85 VT9.1@72.1,81.85 VT6.1@71.1,81.85 VT3.1@70.1,81.85 VT11.1@69.1,81.85 VT8.1@68.1,81.85 VT5.1@67.1,81.85
VDD2: C7.2 pad.4 R51.2 VT17.1 VT18.1 VT19.1 VT20.1 VT21.1 VT22.1 VT23.1 VT24.1 VT25.1 VT26.1 VT27.1 VT28.1 VT29.1 VT30.1 VT31.1 VT32.1 | length 22.2
  Top Layer w0.4: VT18.1@74.1,81.85 VT20.1@75.1,81.85 VT23.1@76.1,81.85 VT26.1@77.1,81.85 VT29.1@78.1,81.85 VT30.1@79.1,81.85 VT31.1@80.1,81.85 VT32.1@81.1,81.85 VT17.1@82.1,81.85 VT21.1@83.1,81.85 ; R51.2@80.7,86.5 C7.2@83.2,86.5 83.1,86.4 VT21.1@83.1,81.85 ; VT28.1@89.1,81.85 VT25.1@88.1,81.85 VT22.1@87.1,81.85 VT19.1@86.1,81.85 VT27.1@85.1,81.85 VT24.1@84.1,81.85 VT21.1@83.1,81.85
VDD3: C9.2 pad.5 R68.2 VT33.1 VT34.1 VT35.1 VT36.1 VT37.1 VT38.1 VT39.1 VT40.1 VT41.1 VT42.1 VT43.1 VT44.1 VT45.1 VT46.1 VT47.1 VT48.1 | length 22.5
  Top Layer w0.4: VT34.1@90.1,81.85 VT36.1@91.1,81.85 VT39.1@92.1,81.85 VT47.1@96.1,81.85 VT48.1@97.1,81.85 VT33.1@98.1,81.85 VT37.1@99.1,81.85 ; R68.2@96.4,86.5 C9.2@99.2,86.5 99.1,86.4 VT37.1@99.1,81.85 ; VT44.1@105.1,81.85 VT41.1@104.1,81.85 VT38.1@103.1,81.85 VT35.1@102.1,81.85 VT43.1@101.1,81.85 VT40.1@100.1,81.85 VT37.1@99.1,81.85
VDD4: C11.2 pad.6 R85.2 VT49.1 VT50.1 VT51.1 VT52.1 VT53.1 VT54.1 VT55.1 VT56.1 VT57.1 VT58.1 VT59.1 VT60.1 VT61.1 VT62.1 VT63.1 VT64.1 | length 22.2
  Top Layer w0.4: VT50.1@106.1,81.85 VT52.1@107.1,81.85 VT55.1@108.1,81.85 VT58.1@109.1,81.85 VT61.1@110.1,81.85 VT62.1@111.1,81.85 VT63.1@112.1,81.85 VT64.1@113.1,81.85 VT49.1@114.1,81.85 VT53.1@115.1,81.85 ; R85.2@112.5,86.5 C11.2@115.2,86.5 ; C11.2@115.1,86.4 VT53.1@115.1,81.85 ; VT60.1@121.1,81.85 VT57.1@120.1,81.85 VT54.1@119.1,81.85 VT51.1@118.1,81.85 VT59.1@117.1,81.85 VT56.1@116.1,81.85 VT53.1@115.1,81.85
VDD5: C13.2 pad.7 R102.2 VT65.1 VT66.1 VT67.1 VT68.1 VT69.1 VT70.1 VT71.1 VT72.1 VT73.1 VT74.1 VT75.1 VT76.1 VT77.1 VT78.1 VT79.1 VT80.1 | length 22.5
  Top Layer w0.4: VT66.1@122.1,81.85 VT67.1@134.1,81.85 VT70.1@135.1,81.85 VT73.1@136.1,81.85 VT76.1@137.1,81.85 ; R102.2@128.4,86.5 C13.2@131.2,86.5 131.1,86.4 VT69.1@131.1,81.85
VDD6: C15.2 pad.8 R119.2 VT81.1 VT82.1 VT83.1 VT84.1 VT85.1 VT86.1 VT87.1 VT88.1 VT89.1 VT90.1 VT91.1 VT92.1 VT93.1 VT94.1 VT95.1 VT96.1 | length 22.5
  Top Layer w0.4: VT82.1@138.1,81.85 VT84.1@139.1,81.85 VT87.1@140.1,81.85 VT90.1@141.1,81.85 VT93.1@142.1,81.85 VT94.1@143.1,81.85 VT95.1@144.1,81.85 VT96.1@145.1,81.85 VT81.1@146.1,81.85 VT85.1@147.1,81.85 ; R119.2@144.1,86.5 C15.2@147,86.5 ; C15.2@147.1,86.4 VT85.1@147.1,81.85 ; VT92.1@153.1,81.85 VT89.1@152.1,81.85 VT86.1@151.1,81.85 VT83.1@150.1,81.85 VT91.1@149.1,81.85 VT88.1@148.1,81.85 VT85.1@147.1,81.85

## Polygon pours and split planes (outlines as drawn)
GND on Top Layer "Top Layer-No Net" (solid, remove dead copper, pour order 4): 50,50 161.2,50 161.2,88.5 50,88.5
GND on Bottom Layer "Top Layer-No Net" (solid, remove dead copper, pour order 6): 50,50 161.2,50 161.2,88.5 50,88.5

## Silkscreen, mask and mechanical layers (free items; w line width, h text height)
Mechanical 3:
  the board outline again, w0.2